# Altium PCB 600米舵机驱动接口板V1.0.PcbDoc
Units mm, origin at the board's own origin, x right, y up, seen from the top; angles counter-clockwise.
Board outline 40 x 40 mm, 2 copper layers (Top Layer, Bottom Layer); 37 components, 27 nets, 182 pads, 70 vias.
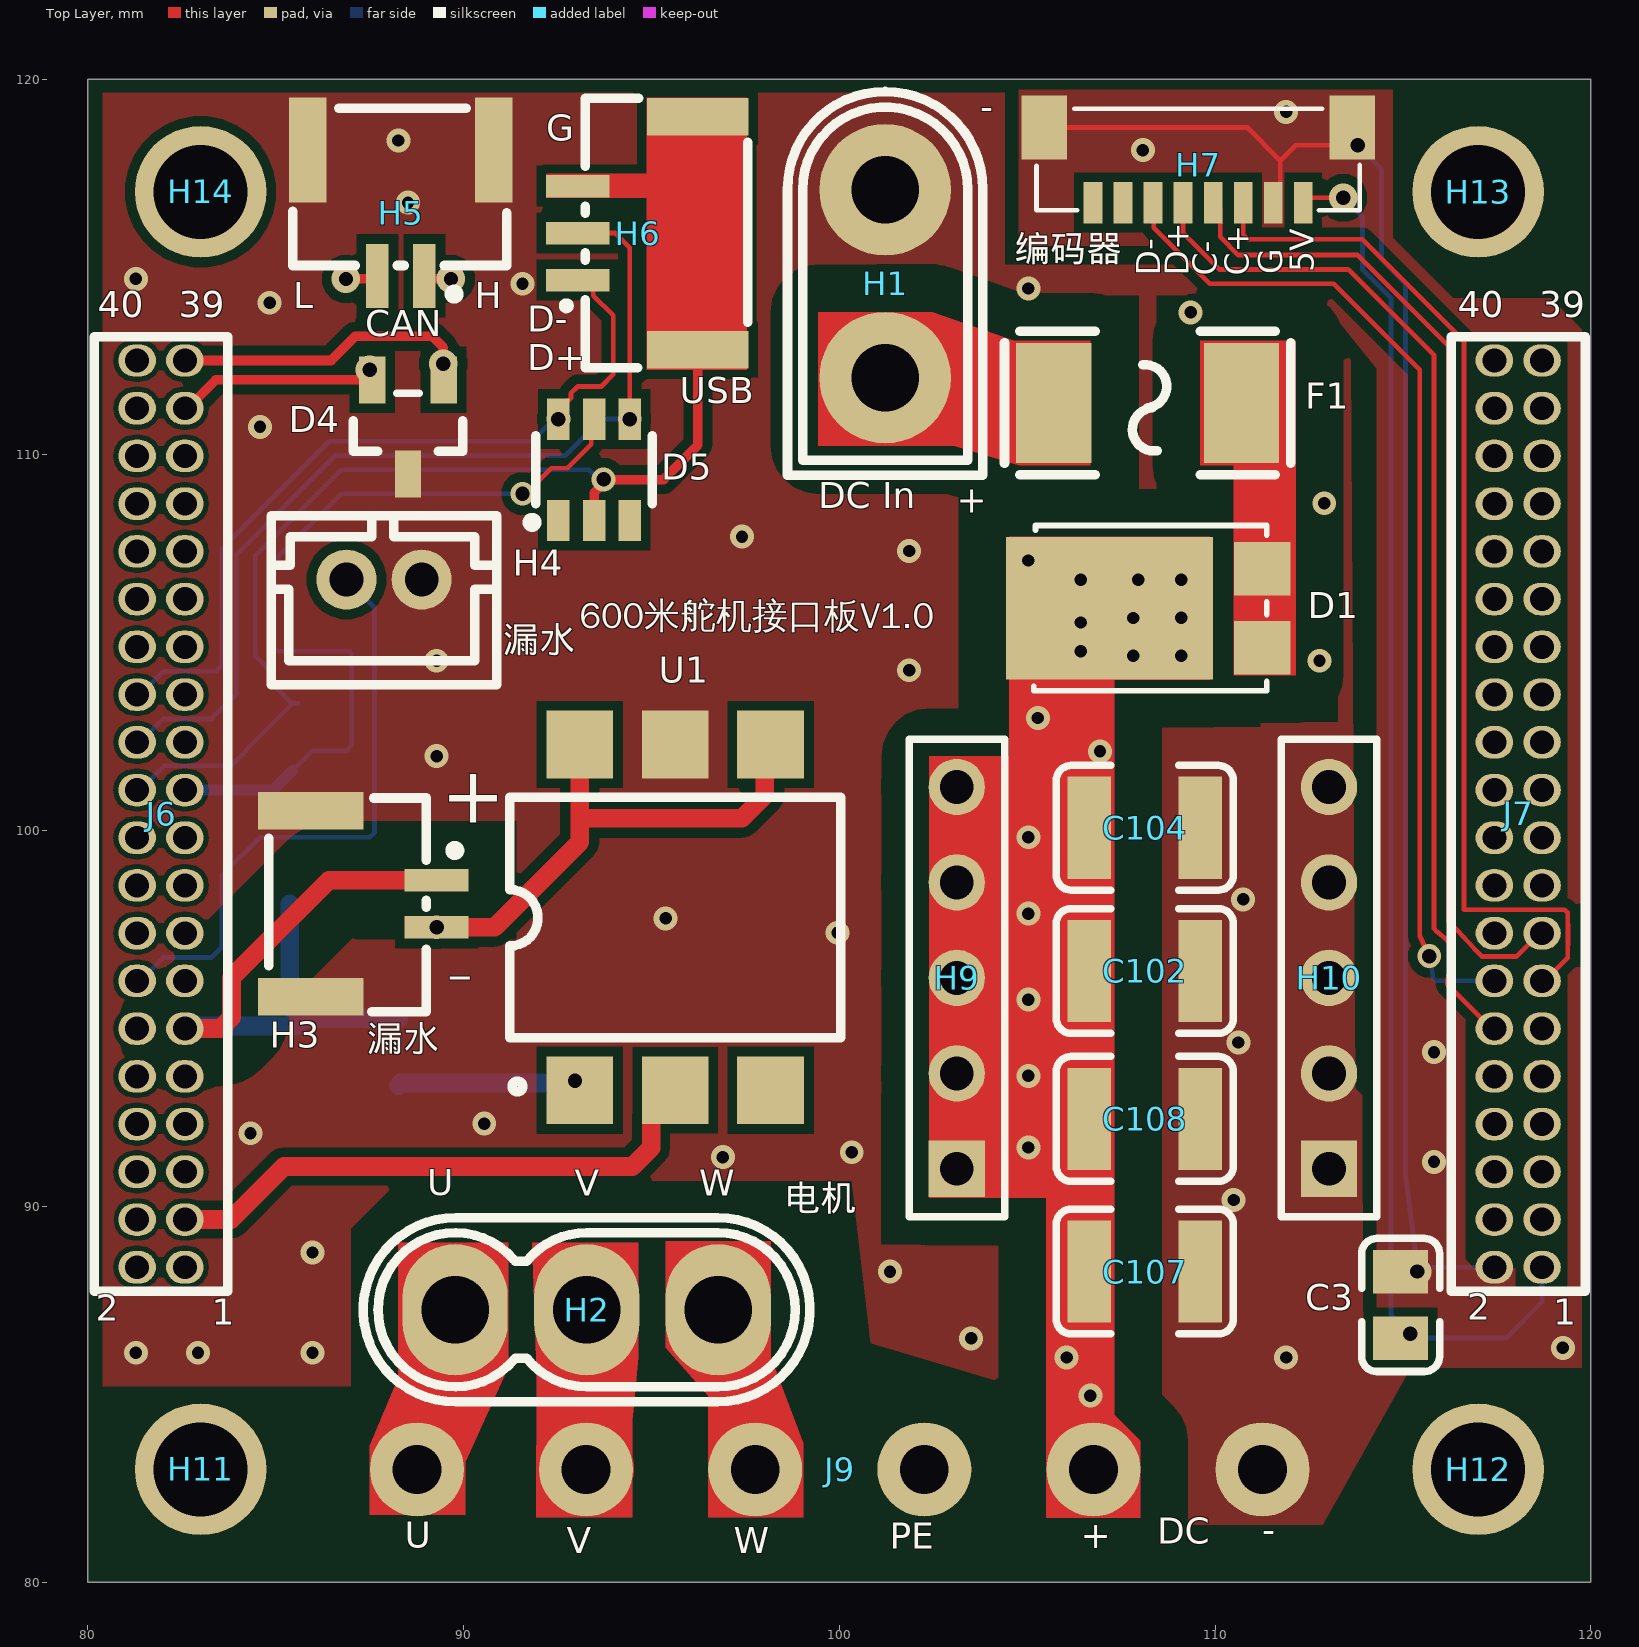
[diagram p0: Top Layer view]
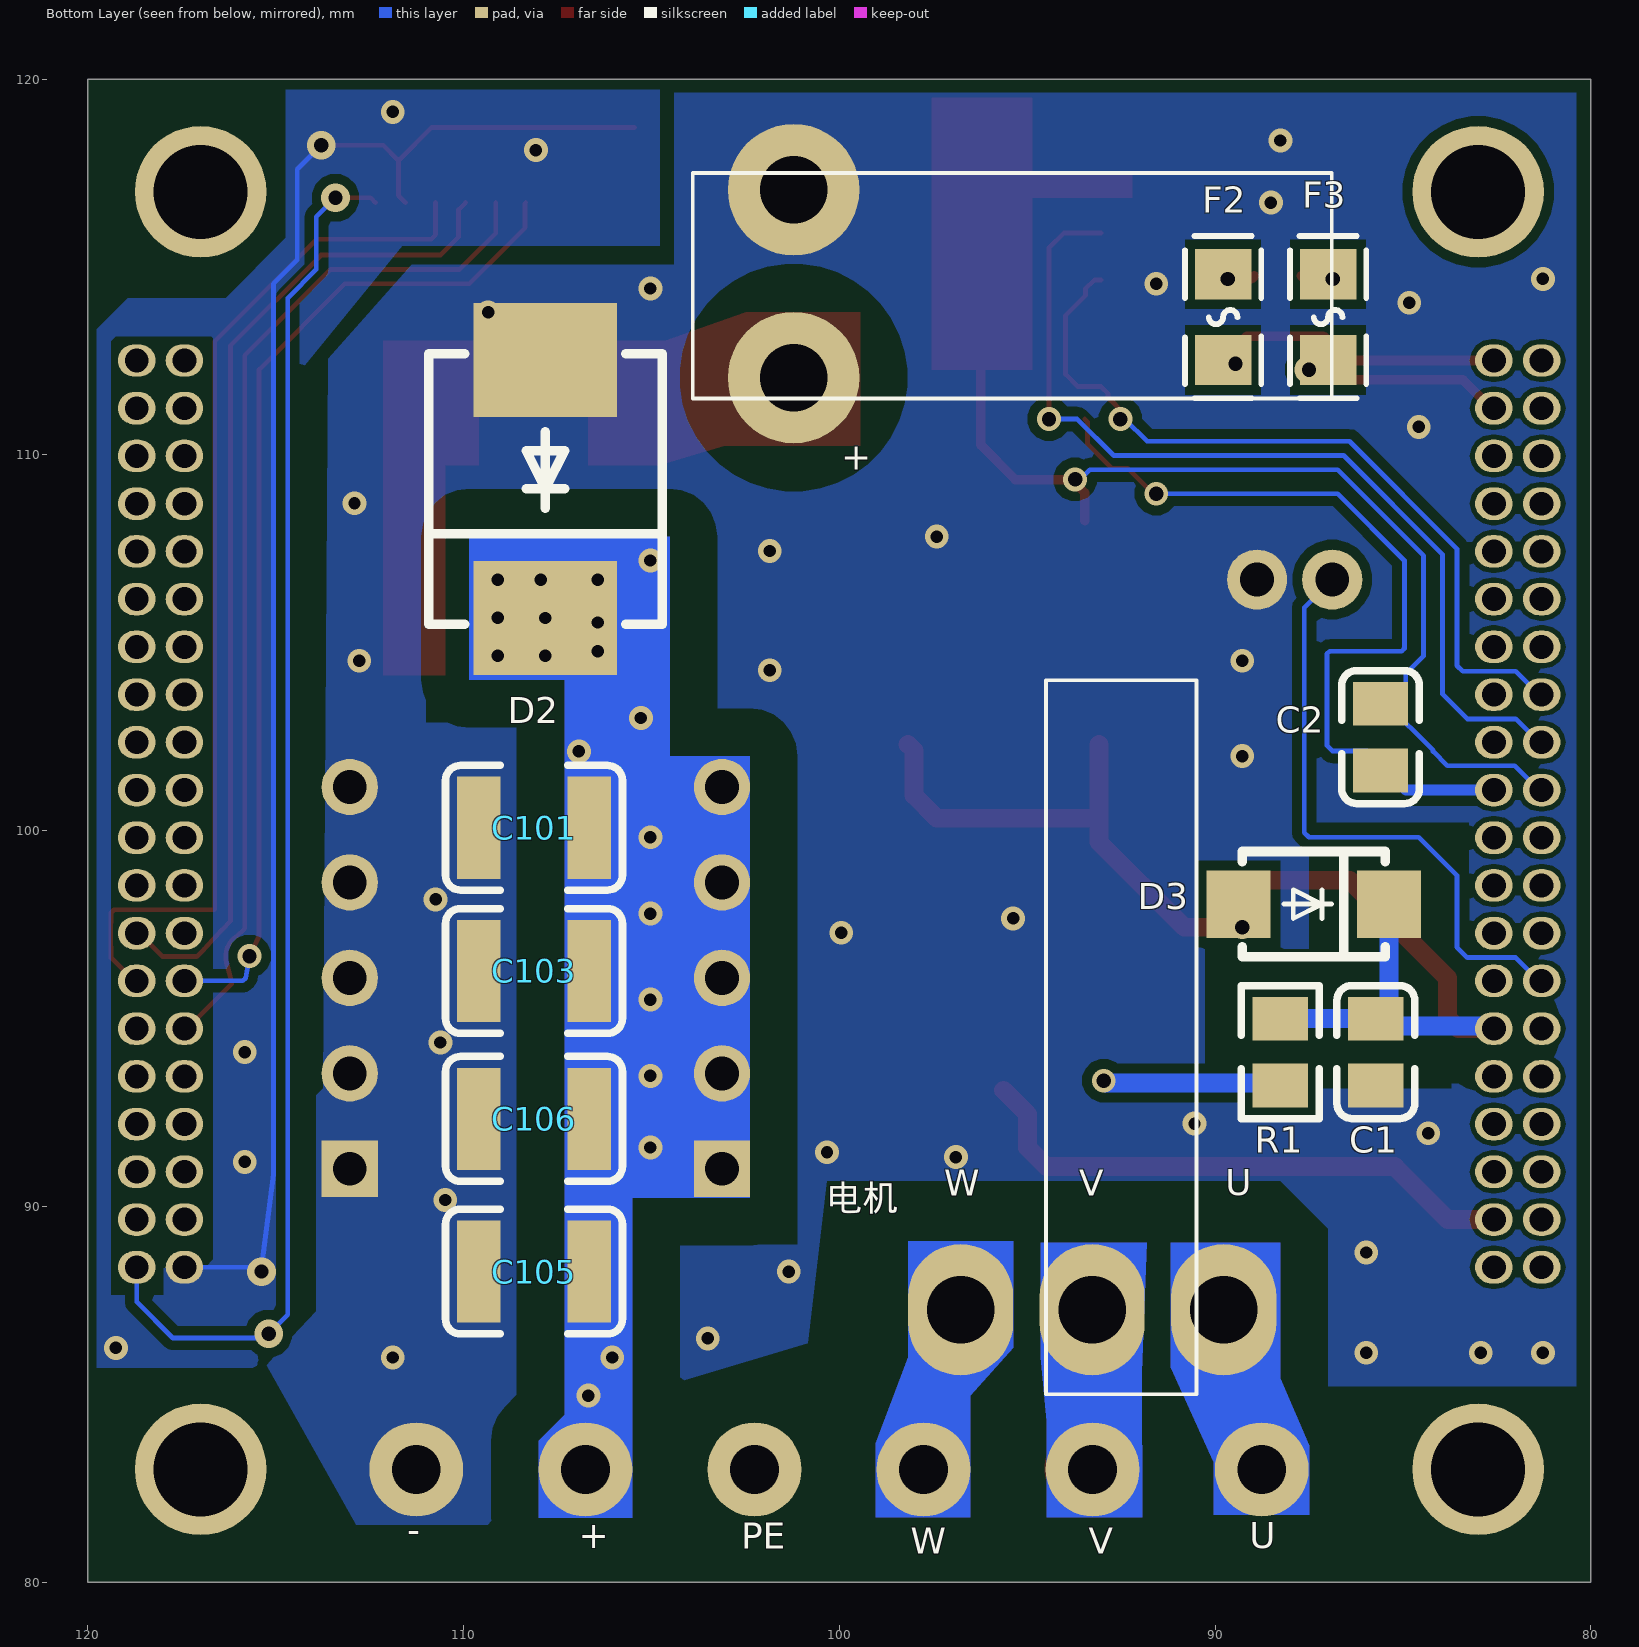
[diagram p1: Bottom Layer view, seen from below]
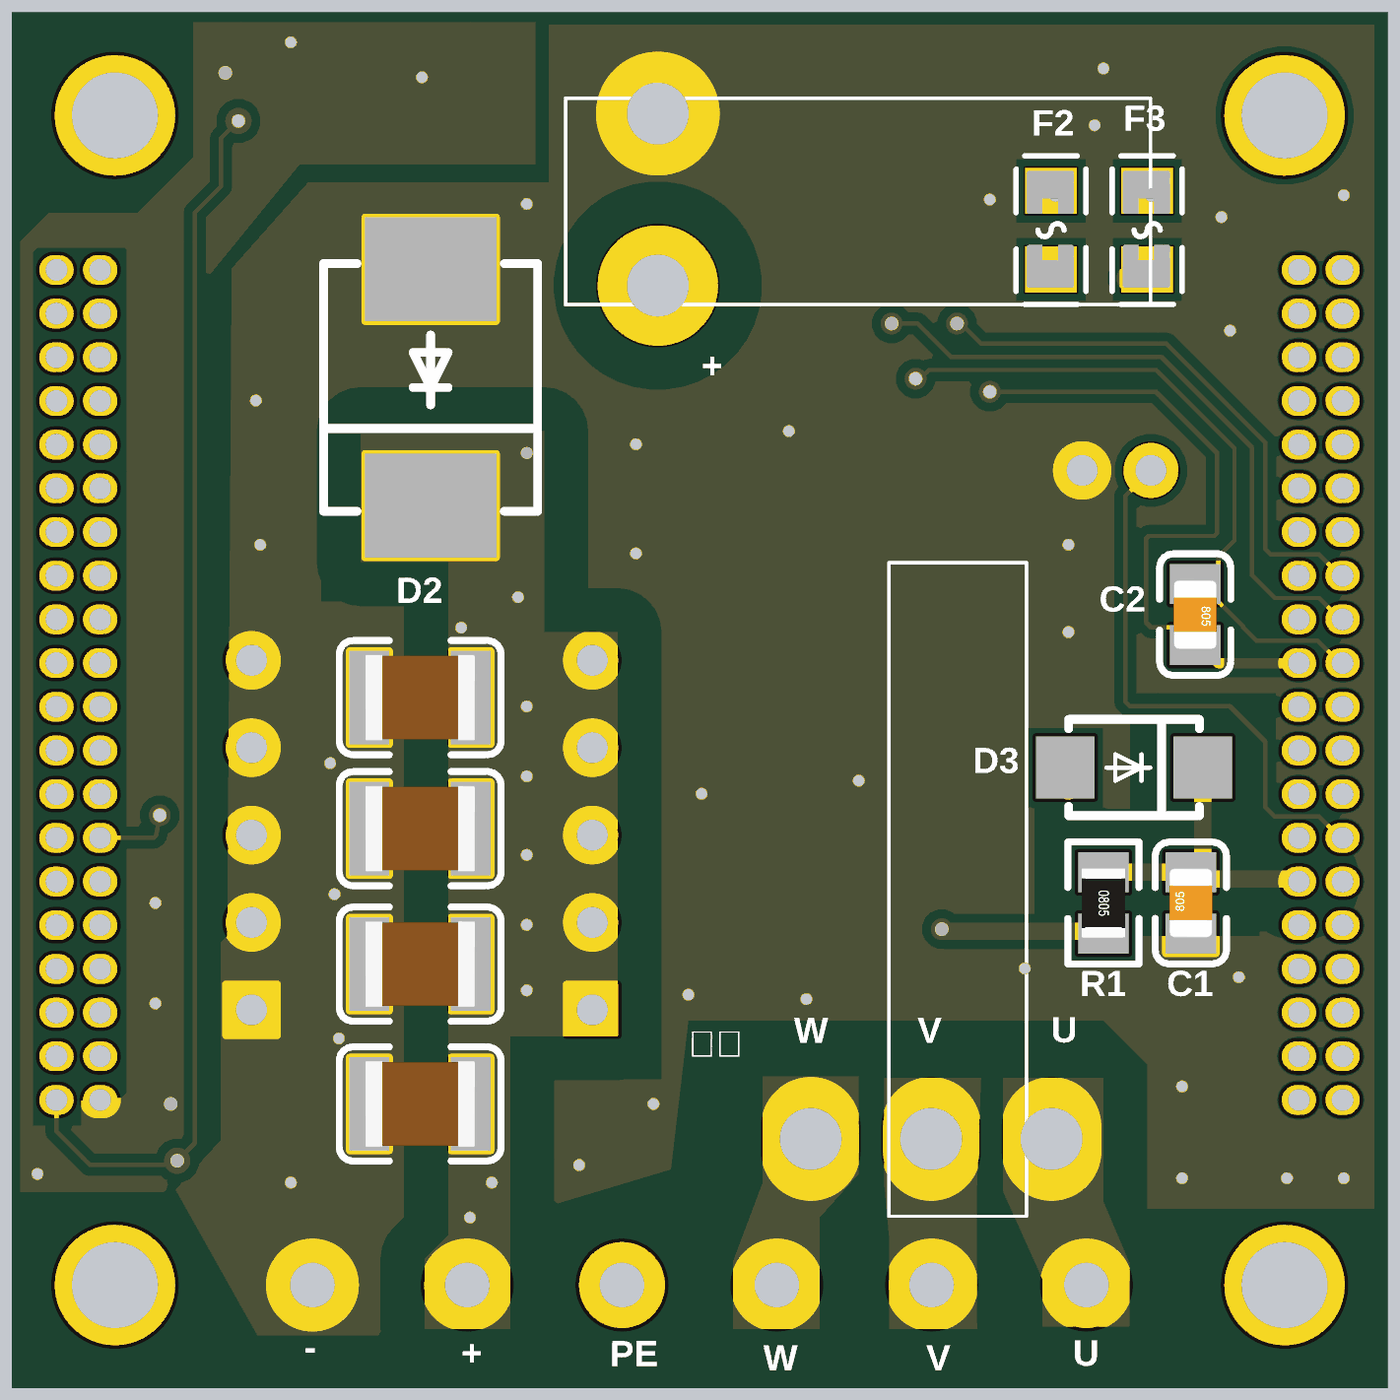
[diagram p2: 3D render of the assembled board from below, using the file's embedded part models]

## Layer stack, top to bottom
Top Solder: solder mask 0.0102, Solder Resist, Dk 3.5
Top Layer: signal copper 0.0356
Dielectric 1: dielectric 0.32, FR-4, Dk 4.8
Bottom Layer: signal copper 0.0356
Bottom Solder: solder mask 0.0102, Solder Resist, Dk 3.5

## Board outline
80,80 80,120 120,120 120,80

## Design rules (kind name [scope] priority, off if disabled: settings)
Clearance 48V [(InNamedPolygon('Bottom0V') OR InNamedPolygon('BottomEncgnd') OR InNamedPolygon('Top0V') OR InNamedPolygon('TopEncgnd')) vs (InNet('24V') OR InNet('DC+') OR InNet('NetD1_1') OR InNet('NetF1_1'))] p1: gap=1.27 ignorepadtopadclearanceinfootprint=FALSE
Clearance Clearance_1 [HasFootprint('HDR-TH_40P-P1.27-V-M-R2-C20-S1.27-ISMC')] p2: gap=0.127 ignorepadtopadclearanceinfootprint=FALSE
Clearance tssop14 [HasFootprint('TSSOP-14_L5.0-W4.5-P0.65-LS6.4-BL')] p3: gap=0.01 ignorepadtopadclearanceinfootprint=TRUE
Clearance [All] p4: gap=0.254 ignorepadtopadclearanceinfootprint=FALSE
PlaneConnect [All] p1: planeconnectstyle=Direct reliefexpansion=0.508 reliefentries=4 reliefconductorwidth=0.254 reliefairgap=0.254
PolygonConnect [All] p1: connectstyle=Direct reliefconductorwidth=0.254 reliefentries=4 polygonreliefangle="90 Angle" airgapwidth=0.254
RoutingVias [All] p1: holewidth=0.711 width=1.27 viastyle="Through Hole" minholewidth=0.711 minwidth=1.27 maxholewidth=0.711 maxwidth=1.27
SolderMaskExpansion [All] p1: expansion=0.102 istentingtop=FALSE
SupplyNets "Schematic Supply Nets_9" [InNet('DC+')] p1: voltage=0.000
SupplyNets "Schematic Supply Nets_8" [InNet('PE')] p2: voltage=0.000
SupplyNets "Schematic Supply Nets_2" [InNet('USB_GND')] p3: voltage=0.000
SupplyNets "Schematic Supply Nets" [InNet('Encoder_GND')] p4: voltage=0.000
SupplyNets "Schematic Supply Nets_1" [InNet('24V')] p5: voltage=0.000
SupplyNets "Schematic Supply Nets_7" [InNet('0V')] p6: voltage=0.000
SupplyNets "Schematic Supply Nets_6" [InNet('V')] p7: voltage=0.000
SupplyNets "Schematic Supply Nets_5" [InNet('U')] p8: voltage=0.000
SupplyNets "Schematic Supply Nets_4" [InNet('W')] p9: voltage=0.000
Width 5mil [(InNet('Encoder_5V') OR InNet('Encoder_GND') OR InNet('Encoder_CLK+') OR InNet('Encoder_CLK-') OR InNet('Encoder_D+') OR InNet('Encoder_D-') OR InNet('DI_RET') OR InNet('USB_D+') OR InNet('USB_D-') OR InNet('USB_VBUS') OR InNet('USB_GND'))] p1: maxlimit=0.762 minlimit=0.127 preferedwidth=0.127
Width Width_1 [All] p2: maxlimit=7.62 minlimit=0.254 preferedwidth=0.254
29 further rules are at their usual default settings.

## Components (designator, comment, footprint, x,y, rotation, side; value= is the part's Value field where it differs from the comment)
C1 "0.1uF  100V" 0805_C 85.725,94.107 r90 bottom
C2 "0.1uF 50V" 0805_C 85.598,102.489 r270 bottom
C3 "0.1uF 50V" 0805_C 114.935,87.376 r270 top
C101 "4.7uf 100V" 1210_C 108.127,100.076 r180 bottom value=4.7uF
C102 "4.7uf 100V" 1210_C 108.127,96.266 r180 top value=4.7uF
C103 "4.7uf 100V" 1210_C 108.127,96.266 r180 bottom value=4.7uF
C104 "4.7uf 100V" 1210_C 108.127,100.076 r180 top value=4.7uF
C105 "4.7uf 100V" 1210_C 108.127,88.265 r180 bottom value=4.7uF
C106 "4.7uf 100V" 1210_C 108.127,92.329 r180 bottom value=4.7uF
C107 "4.7uf 100V" 1210_C 108.127,88.265 r180 top value=4.7uF
C108 "4.7uf 100V" 1210_C 108.127,92.329 r180 top value=4.7uF
D1 "SD10U100SL" TO-227B-SMD_L6.1-W4.3-LS7.0-RD 109.221,105.918 r0 top
D2 "SMCJ48A/TR13" SMC_L7.1-W6.2-LS8.1-FD 107.823,109.093 r270 bottom
D3 "SS14" SMAF_L3.5-W2.6-LS4.7-FD 87.376,98.044 r180 bottom
D4 "PSM712-LF-T7" SOT-23(SOT-23-3) 88.519,110.744 r90 top
D5 "UBT26A05L03" SOT-23-6_L2.9-W1.6-P0.95-LS2.8-BR 93.472,109.601 r270 top
F1 "JFC2410-2100TS" F2410 108.204,111.379 r0 top
F2 "BSMD0805-001-60V" F0805 89.789,113.665 r90 bottom
F3 "BSMD0805-001-60V" F0805 86.995,113.665 r90 bottom
H1 "XT30U-M" CONN-TH_XT30U-M-PCB 101.219,114.554 r90 top
H2 "MR30-M" CONN-TH_MR30-M-PCB 93.274,87.249 r0 top
H3 "GH1.25-2P 立贴" CONN-TH_2P-P1.25_XUNPU_WAFER-GH1.25-2PLB 87.606,98.054 r270 top
H4 "PH 2P" CONN-TH_B2B-PH-K-S 87.884,106.68 r180 top
H5 "GH1.25-2P立贴" CONN-TH_2P-P1.25_XUNPU_WAFER-GH1.25-2PLB 88.33,116.435 r180 top
H6 "GH1.25-3P立贴" CONN-SMD_3P-P1.25_GH1.25-3PLTPZ 94.637,115.902 r90 top
H7 "SM08B-SURS-TF(LF)(SN)" CONN-SMD_SM08B-SURS-TF 109.546,117.712 r180 top
H9 "1×6插针 2.54" HDR1X5 103.124,91 r90 top locked
H10 "1×6插针 2.54" HDR1X5 113.03,91 r90 top locked
H11 "定位孔" Hole-2.5×3.5#1 83.058,75.946 r0 top
H12 "定位孔" Hole-2.5×3.5#2 117.348,75.692 r0 top
H13 "定位孔" Hole-2.5×3.5#3 123.825,116.967 r0 top
H14 "定位孔" Hole-2.5×3.5#4 75.311,113.919 r0 top
J6 "2*20-φ1.27" HDR-TH_40P-P1.27-V-M-R2-C20-S1.27-ISMC 81.948,100.445 r90 top locked
J7 "2*20-φ1.27" HDR-TH_40P-P1.27-V-M-R2-C20-S1.27-ISMC 118.065,100.445 r90 top locked
J9 "φ1.3" ISMC_POWER 88.76,83 r0 top locked
R1 "3.9kΩ  1%" 0805_R 88.265,94.107 r270 bottom
U1 "GAQV211G4EH" SMD-6_L8.8-W6.4-P2.54-LS9.6-BL 95.631,97.691 r0 top

## Footprints (in the part's own frame and the unit in brackets; to place one, negate y for a bottom-side part, rotate by r counter-clockwise, add the part's x,y. Pads: shape width x height; smd on the part's side, far side on the other; paste and mask are expansions set on the pad)
0805_C [mm]
  rect 1.16x1.47 smd: 1(-0.89,0) 2(0.89,0)
  silkscreen extent -1.77,-1.04 1.77,1.04, body extent -1,-0.63 1,0.63, height 0.77
0805_R [mm]
  rect 1.16x1.47 smd: 1(-0.89,0) 2(0.89,0)
  silkscreen extent -1.77,-1.04 1.77,1.03, body extent -1,-0.63 1,0.63, height 0.49
1210_C [mm]
  rect 1.16x2.72 smd: 1(-1.475,0) 2(1.475,0)
  silkscreen extent -2.36,-1.66 2.35,1.66, body extent -1.6,-1.25 1.6,1.25, height 1.3
CONN-SMD_3P-P1.25_GH1.25-3PLTPZ [mm]
  rect 0.6x1.7 smd: 1(-1.25,1.6) 2(0,1.6) 3(1.25,1.6)
  rect 1x2.7 smd: 4(-3.1,-1.6) 5(3.1,-1.6)
  silkscreen extent -3.59,-2.92 3.58,2
CONN-SMD_SM08B-SURS-TF [mm]
  rect 0.5x1.1 smd paste+0 mask+0.05: 1(-2.8,1) 2(-2,1) 3(-1.2,1) 4(-0.4,1) 5(0.4,1) 6(1.2,1) 7(2,1) 8(2.8,1)
  rect 1.21x1.7 smd paste+0 mask+0.05: 9(-4.1,-1) 10(4.1,-1)
  silkscreen extent -4.3,-1.5 4.3,1.2
CONN-TH_2P-P1.25_XUNPU_WAFER-GH1.25-2PLB [mm]
  rect 0.6x1.7 smd: 1(-0.625,1.675) 2(0.625,1.675)
  rect 1x2.8 smd: 3(2.475,-1.675) 4(-2.475,-1.675)
  silkscreen extent -2.81,-2.79 2.87,2.29
CONN-TH_B2B-PH-K-S [mm]
  round 1.6 hole 0.9 paste-2539.97 mask+0.051: 1(1,0) 2(-1,0)
  silkscreen extent -3,-1.7 3,2.8
CONN-TH_MR30-M-PCB [mm]
  oval 2.8x3.5 hole 1.8 paste-2539.97 mask+0.05: 1(-3.5,0) 2(0,0) 3(3.5,0)
  silkscreen extent -5.94,-2.45 5.94,2.45
CONN-TH_XT30U-M-PCB [mm]
  round 3.5 hole 1.8 paste-2539.97 mask+0.05: 1(-2.5,0) 2(2.5,0)
  silkscreen extent -5.1,-2.6 5.11,2.6
F0805 [mm]
  rect 1.335x1.5 smd paste-100 mask+0.051: 1(-1.142,0) 2(1.142,0)
  silkscreen extent -2.16,-1.02 2.16,1.02
F2410 [mm]
  rect 2x3.2 smd: 1(-2.5,0) 2(2.5,0)
  silkscreen extent -3.81,-1.91 3.81,1.91
HDR1X5 [mm] "Connector; Header; 5 Position"
  rect 1.5x1.5 hole 0.9: 1(0,0)
  round 1.5 hole 0.9: 2(2.54,0) 3(5.08,0) 4(7.62,0) 5(10.16,0)
  silkscreen extent -1.27,-1.27 11.43,1.27
HDR-TH_40P-P1.27-V-M-R2-C20-S1.27-ISMC [mm]
  oval 0.864x1 hole 0.635: 1(-12.065,-0.635) 2(-12.065,0.635) 3(-10.795,-0.635) 4(-10.795,0.635) 5(-9.525,-0.635) 6(-9.525,0.635) 7(-8.255,-0.635) 8(-8.255,0.635) 9(-6.985,-0.635) 10(-6.985,0.635) 11(-5.715,-0.635) 12(-5.715,0.635) 13(-4.445,-0.635) 14(-4.445,0.635) 15(-3.175,-0.635) 16(-3.175,0.635) 17(-1.905,-0.635) 18(-1.905,0.635) 19(-0.635,-0.635) 20(-0.635,0.635) 21(0.635,-0.635) 22(0.635,0.635) 23(1.905,-0.635) 24(1.905,0.635) 25(3.175,-0.635) 26(3.175,0.635) 27(4.445,-0.635) 28(4.445,0.635) 29(5.715,-0.635) 30(5.715,0.635) 31(6.985,-0.635) 32(6.985,0.635) 33(8.255,-0.635) 34(8.255,0.635) 35(9.525,-0.635) 36(9.525,0.635) 37(10.795,-0.635) 38(10.795,0.635) 39(12.065,-0.635) 40(12.065,0.635)
  silkscreen extent -12.7,-1.78 12.7,1.78
Hole-2.5×3.5#1 [mm] "3.2mm定位孔"
  round 3.5 hole 2.5: 1(-0.058,7.054)
Hole-2.5×3.5#2 [mm] "3.2mm定位孔"
  round 3.5 hole 2.5: 1(-0.348,7.308)
Hole-2.5×3.5#3 [mm] "3.2mm定位孔"
  round 3.5 hole 2.5: 1(-6.825,0.033)
Hole-2.5×3.5#4 [mm] "3.2mm定位孔"
  round 3.5 hole 2.5: 1(7.689,3.081)
ISMC_POWER [mm] "ISMC电源针"
  round 2.5 hole 1.3: 1(0,0) 2(4.5,0) 3(9,0) 4(13.5,0) 5(18,0) 6(22.5,0)
SMAF_L3.5-W2.6-LS4.7-FD [mm]
  rect 1.7x1.8 smd: 1(-2,0) 2(2,0)
  silkscreen extent -1.9,-1.4 1.9,1.4
SMC_L7.1-W6.2-LS8.1-FD [mm]
  rect 3.03x3.82 smd: 1(-3.435,0) 2(3.435,0)
  silkscreen extent -3.6,-3.11 3.6,3.11
SMD-6_L8.8-W6.4-P2.54-LS9.6-BL [mm]
  rect 1.78x1.8 smd: 1(-2.54,-4.6) 2(0,-4.6) 3(2.54,-4.6) 4(2.54,4.6) 5(0,4.6) 6(-2.54,4.6)
  silkscreen extent -4.4,-4.64 4.4,3.2
SOT-23(SOT-23-3) [mm]
  rect 1.25x0.7 smd: 1(1.25,-0.95) 2(1.25,0.95) 3(-1.25,0)
  silkscreen extent -0.65,-1.46 0.9,1.46, body extent -1.5,-1.5 1.5,1.5, height 1.3
SOT-23-6_L2.9-W1.6-P0.95-LS2.8-BR [mm]
  rect 1.1x0.6 smd paste+0 mask+0.051: 1(1.35,-0.95) 2(1.35,0) 3(1.35,0.95) 4(-1.35,0.95) 5(-1.35,0) 6(-1.35,-0.95)
  silkscreen extent -0.9,-1.78 1.52,1.55
TO-227B-SMD_L6.1-W4.3-LS7.0-RD [mm]
  rect 1.5x1.422 smd: 1(2.033,-1.05) 2(2.033,1.05)
  rect 5.5x3.8 smd: 3(-2.033,0)
  silkscreen extent -4.05,-2.2 2.15,2.2

## Part data
C1 C2 C3: library part "0805 1uF (105) 10% 50V", "贴片电容", Package=0805, SuppliersPartNumber=C28323, ComponentLink1Description=供应商链接, ComponentLink1URL=http://www.szlcsc.com/product/details_29074.html, Supplier=LC
C101 C102 C103 C104 C105 C106 C107 C108: library part "1210 4.7uf", "贴片电容", JLCPCB Part Class="Extended Part", LCSC Part Name="4.7uF ±10% 100V", Manufacturer=FH(风华), Manufacturer Part=1210B475K101NT, Temperature Coefficient=X7R, Tolerance=±10%, Voltage Rated=100V, Add into BOM=yes, Convert to PCB=yes, Datasheet=https://atta.szlcsc.com/upload/public/pdf/source/20210617/C2840282_5B7AB5BFD77495008CFAB3FC2796A0E9.pdf, Device=1210B475K101NT, Supplier=LCSC, Supplier Footprint=1210, Supplier Part=C2840282, Symbol=1210B475K101NT
D1: "肖特基二极管", Forward Voltage (Vf@If)=570mV@10A, JLCPCB Part Class="Extended Part", LCSC Part Name="电压:100V 电流:10A", Manufacturer=LGE(鲁光), Rectified Current=10A, Reverse Leakage Current (Ir)=200uA@100V, Reverse Voltage (Vr)=100V, Add into BOM=yes, Convert to PCB=yes, Datasheet=https://atta.szlcsc.com/upload/public/pdf/source/20211009/BD93C46FB22A14806A56CC8AAFB52095.pdf, Device=SD10U100SL, Diode Configuration=独立式, Manufacturer Part=SD10U100SL, Supplier=LCSC, Supplier Footprint=TO-277, Supplier Part=C2903879, Symbol=SD10U100SL
D2: "TVS", Breakdown Voltage=53.3V, JLCPCB Part Class="Extended Part", Manufacturer=Brightking(君耀电子), Maximum Clamping Voltage=77.4V, Peak Pulse Current (Ipp)=19.4A, Peak Pulse Power Dissipation (Ppp)=1.5kW, Reverse Stand-Off Voltage (Vrwm)=48V, Add into BOM=yes, Convert to PCB=yes, Datasheet=https://atta.szlcsc.com/upload/public/pdf/source/20181127/C310089_DF11A7ED4CCF9CC3586EB1D10F86E9D6.pdf, Device=SMCJ48A/TR13, LCSC Part Name=SMCJ48A/TR13, Manufacturer Part=SMCJ48A/TR13, Supplier=LCSC, Supplier Footprint=SMC(DO-214AB), Supplier Part=C310056, Symbol=SMCJ48A_C310056, Type=TVS
D3: library part SS34F_C908669, Average Rectified Current (Io)=3A, Forward Voltage (Vf@If)=550mV@3A, JLCPCB Part Class="Extended Part", LCSC Part Name="电压:40V 电流:3A", Manufacturer=GOODWORK(固得沃克), Manufacturer Part=SS34F, Reverse Leakage Current (Ir)=200uA@40V, Reverse Voltage (Vr)=40V, Add into BOM=yes, Convert to PCB=yes, Datasheet=https://atta.szlcsc.com/upload/public/pdf/source/20201231/C908669_14F884D2643FB3EE455C9EAA3A20B275.pdf, Device=SS34F_C908669, Diode Configuration=独立式, Supplier=LCSC, Supplier Footprint=SMAF, Supplier Part=C908669, Symbol=SS34F_C908669
D4: "双向TVS", Clamping Voltage=19V, JLCPCB Part Class="Basic Part", Manufacturer=PROTEK, Reverse Stand-Off Voltage (Vrwm)=12V, Voltage - Breakdown=13.3V, Add into BOM=yes, Convert to PCB=yes, Datasheet=https://atta.szlcsc.com/upload/public/pdf/source/20140717/1457707154667.pdf, Device=PSM712-LF-T7, LCSC Part Name=PSM712-LF-T7, Manufacturer Part=PSM712-LF-T7, Supplier=LCSC, Supplier Footprint=SOT-23, Supplier Part=C32677, Symbol=PSM712-LF-T7, Type=TVS
D5: "TVS", Breakdown Voltage=6V, JLCPCB Part Class="Extended Part", Manufacturer=Brightking(君耀电子), Maximum Clamping Voltage=17V, Add into BOM=yes, Convert to PCB=yes, Datasheet=https://atta.szlcsc.com/upload/public/pdf/source/20200427/C523544_824ACAC2A221CAA635828872F8565CA9.pdf, Device=UBT26A05L03, LCSC Part Name=UBT26A05L03, Manufacturer Part=UBT26A05L03, Number of Lines=双路, Supplier=LCSC, Supplier Footprint=SOT-23-6L, Supplier Part=C523544, Symbol=UBT26A05L03, Type=ESD
F1: "保险管", Breaking Capacity=50A, Current Rating=10A, JLCPCB Part Class="Extended Part", LCSC Part Name="10A 125V 贴片式保险丝 慢断", Manufacturer=JDTfuse(集电通), Operating Temperature=-55℃~+125℃, Voltage Rating  (AC)=125V, Add into BOM=yes, Convert to PCB=yes, Datasheet=https://atta.szlcsc.com/upload/public/pdf/source/20230515/1D43BDD82FA89335B41B370141760CD9.pdf, Device=JFC2410-2100TS, Manufacturer Part=JFC2410-2100TS, Supplier=LCSC, Supplier Footprint=SMD, Supplier Part=C136391, Symbol=JFC2410-2100TS, Type=贴片式保险丝, Voltage Rating (DC)=125V
F2 F3: "自恢复保险", Current Rating (Max)=30A, Hold Current=10mA, JLCPCB Part Class="Extended Part", LCSC Part Name="60V 10mA 0805自恢复", Manufacturer=BHFUSE(佰宏), Operating Voltage (Max)=60V, Power Dissipation=500mW, Resistance - Initial (Ri) (Min)=15Ω, Resistance - Post Trip (R1) (Max)=100Ω, Trip Current=50mA, Add into BOM=yes, Convert to PCB=yes, Datasheet=https://atta.szlcsc.com/upload/public/pdf/source/20230512/7A46D6CD923C15CBB98FD769C08EDD80.pdf, Device=BSMD0805-001-60V, Manufacturer Part=BSMD0805-001-60V, Maximum Time to Trip=1.5s, Supplier=LCSC, Supplier Footprint=0805, Supplier Part=C5222212, Symbol=BSMD0805-001-60V
H1: Colour=黄色, contact resistance=-, JLCPCB Part Class="Extended Part", LCSC Part Name="AMASS(艾迈斯)轻量版锂电池插头公头 XT30U-M", Manufacturer=AMASS(艾迈斯), Add into BOM=yes, Belt length=-, Brand=艾迈斯, Convert to PCB=yes, Datasheet=https://atta.szlcsc.com/upload/public/pdf/source/20170606/1496716542582.pdf, Device=XT30U-M, FlameRetardantGrade=-, Input=-, InsulationMaterial=-, Interface=-, InterfaceType=公头, Manufacturer Part=XT30U-M, MaximumCurrent=-, MetalMaterial=-, Model=XT30U-M, NumberOfUSBHoles=-, Output=-, Power=-, RatedCurrent=-, RatedVoltage=-, RecommendedWireGauge=-, Size=-, specifications=-, Supplier=LCSC, Supplier Footprint=-, Supplier Part=C99101, Symbol=XT30U-M, Type=插头, Type1=-
H2: Colour=-, JLCPCB Part Class="Extended Part", LCSC Part Name="AMASS(艾迈斯)锂电池三芯电源连接器公头MR30-M 2件套", Manufacturer=AMASS(艾迈斯), Add into BOM=yes, Belt length=-, Brand=艾迈斯, contact resistance=-, Convert to PCB=yes, Datasheet=https://atta.szlcsc.com/upload/public/pdf/source/20170412/1491969315720.pdf, Device=MR30-M, FlameRetardantGrade=-, Input=-, InsulationMaterial=-, Interface=-, InterfaceType=公头, Manufacturer Part=MR30-M, MaximumCurrent=-, MetalMaterial=-, Model=MR30-M, NumberOfUSBHoles=-, Output=-, Power=-, RatedCurrent=-, RatedVoltage=-, RecommendedWireGauge=-, Size=-, specifications=3pin, Supplier=LCSC, Supplier Footprint=-, Supplier Part=C99873, Symbol=MR30-M, Type=航空插头, Type1=-
H3: library part WAFER-GH1.25-2PLB, Current Rating (Max)=1A, JLCPCB Part Class="Extended Part", LCSC Part Name="1x2P 间距:1.25mm 立贴 系列:GH", Manufacturer=XUNPU(讯普), Operating Temperature Range=-25℃~+85℃, Add into BOM=yes, Convert to PCB=yes, Datasheet=https://atta.szlcsc.com/upload/public/pdf/source/20220527/44F824AAC8C2B617205E15955FF9C23D.pdf, Device=WAFER-GH1.25-2PLB, Manufacturer Part=WAFER-GH1.25-2PLB, Mounting Style=立贴, Number of Pins=2P, Number of PINs Per Row=2, Number of Rows=1, Pins Structure=1x2P, Pitch=1.25mm, Reference Series=GH, Supplier=LCSC, Supplier Footprint=SMD,P=1.25mm, Supplier Part=C3029368, Symbol=WAFER-GH1.25-2PLB
H4: library part PH2.0-2P, "端子", JLCPCB Part Class="Extended Part", LCSC Part Name=B2B-PH-K-S(LF)(SN), Manufacturer=JST, Add into BOM=yes, Contact Material=黄铜, Convert to PCB=yes, Datasheet=https://atta.szlcsc.com/upload/public/pdf/source/20171026/C131337_15089839672461058811.pdf, Device=B2B-PH-K-S(LF)(SN), Manufacturer Part=B2B-PH-K-S(LF)(SN), Mounting Style=-, Name=B2B-PH-K-S(LF)(SN), Number of PINs Per Row=2, Number of Rows=1, Pins Structure=1x2P, Pitch=2mm, Reference Series=PH, Row Spacing=-, Supplier=LCSC, Supplier Footprint=插件, Supplier Part=C131337, Symbol=B2B-PH-K-S(LF)(SN)
H5: library part WAFER-GH1.25-2PLB, "连接器", Current Rating (Max)=1A, JLCPCB Part Class="Extended Part", LCSC Part Name="1x2P 间距:1.25mm 立贴 系列:GH", Manufacturer=XUNPU(讯普), Operating Temperature Range=-25℃~+85℃, Add into BOM=yes, Convert to PCB=yes, Datasheet=https://atta.szlcsc.com/upload/public/pdf/source/20220527/44F824AAC8C2B617205E15955FF9C23D.pdf, Device=WAFER-GH1.25-2PLB, Manufacturer Part=WAFER-GH1.25-2PLB, Mounting Style=立贴, Number of Pins=2P, Number of PINs Per Row=2, Number of Rows=1, Pins Structure=1x2P, Pitch=1.25mm, Reference Series=GH, Supplier=LCSC, Supplier Footprint=SMD,P=1.25mm, Supplier Part=C3029368, Symbol=WAFER-GH1.25-2PLB
H6: library part GH1.25-3PLTPZ, "连接器", JLCPCB Part Class="Extended Part", LCSC Part Name=GH1.25-3P立贴编带加盖, Manufacturer=BOOMELE(博穆精密), Add into BOM=yes, Convert to PCB=yes, Datasheet=https://atta.szlcsc.com/upload/public/pdf/source/20211125/08A09A4909F58AF780B71FE423A00F7E.pdf, Device=GH1.25-3PLTPZ, Manufacturer Part=GH1.25-3PLTPZ, Supplier=LCSC, Supplier Footprint=-, Supplier Part=C2829261, Symbol=GH1.25-3PLTPZ
H7: "连接器", Colour=白色, Current Rating (Max)=500mA, Flame Retardant Rating=UL94V-0, JLCPCB Part Class="Extended Part", LCSC Part Name="1x8P 间距:0.8mm 卧贴 系列:SUR", Manufacturer=JST, Operating Temperature Range=-25℃~+85℃, Rated Voltage (Max)=30V, Add into BOM=yes, Contact Material=铜合金, Contact Plating=锡, Convert to PCB=yes, Datasheet=https://atta.szlcsc.com/upload/public/pdf/source/20211104/F9E1F8CA9D999D7845259FE213F9F750.pdf, Device=SM08B-SURS-TF(LF)(SN), Manufacturer Part=SM08B-SURS-TF(LF)(SN), Mounting Style=卧贴, Number of Pins=8P, Number of PINs Per Row=8, Number of Rows=1, Pins Structure=1x8P, Pitch=0.8mm, Plastic Material=PA, Reference Series=SUR, Row Spacing=-, Supplementary Features=辅助焊脚, Supplier=LCSC, Supplier Footprint=SMD,P=0.8mm,卧贴, Supplier Part=C595161, Symbol=SM08B-SURS-TF(LF)(SN), X-Length of Bottom Edge on Board (Spacing Line)=8.6mm, Y-Width of Bottom Edge on Board=2.7mm, Z-Height of the Board=1.75mm
H9 H10: library part "Header 5", "Header, 5-Pin", LatestRevisionDate=17-Jul-2002, LatestRevisionNote="Re-released for DXP Platform.", Publisher="Altium Limited"
H11 H12 H13 H14: library part Hole
J6 J7: library part 2.0-2*20PM, "插针孔", Current Rating (Max)=-, JLCPCB Part Class="Extended Part", LCSC Part Name="间距:2mm 直插", Manufacturer=BOOMELE(博穆精密), Add into BOM=yes, Circular Hole / Square Hole=-, Contact Material=-, Contact Plating=-, Convert to PCB=yes, Datasheet=https://atta.szlcsc.com/upload/public/pdf/source/20230330/72429EBD17B7DF6EF48873C4D9CA2FEF.pdf, Device=2.0-2*20PM, Holes Direction=-, Holes Structure=-, Insulation Height=-, Manufacturer Part=2.0-2*20PM, Mounting Type=直插, Number of Holes=40P, Number of Rows=双排, Operating Temperature Range=-, Pitch=2mm, Row Spacing=2mm, Soldering Temperature(Max)=-, Supplier=LCSC, Supplier Footprint=插件,P=2mm, Supplier Part=C110426, Symbol=直排母2*20p, Voltage Rating (Max)=-
J9: library part "Pin HDR1X6", "插针孔"
R1: library part "0805 82Ω (82R0) 1%", "贴片电阻", ComponentLink1Description=供应商链接, ComponentLink1URL=http://www.szlcsc.com/product/details_18529.html
U1: Isolation Voltage(Vrms)=-, JLCPCB Part Class="Extended Part", LCSC Part Name="GAQV211G4EH 1 Form A(SPST-NO) 负载电压:40V 连续负载电流:4.5A", Load Current=4.5A, Load Voltage=40V, Manufacturer=SUPSiC(国晶微半导体), Voltage - Forward(Vf)=1.2V, Add into BOM=yes, Contact Form=-, Convert to PCB=yes, Datasheet=https://atta.szlcsc.com/upload/public/pdf/source/20241011/CA0590B664AED94D4C3AAC21686DAD45.pdf, Device=GAQV211G4EH, Load Type=-, Manufacturer Part=GAQV211G4EH, RDS(on)=33mΩ, Supplier=LCSC, Supplier Footprint=SMD-6, Supplier Part=C7435166, Symbol=GAQV211G4EH, Turn-off time=50us, Turn-on time=1.5ms

## Via types
v1: diameter 0.635, hole 0.33, Top Layer to Bottom Layer, tented both sides, 55 vias
v2: diameter 0.762, hole 0.381, Top Layer to Bottom Layer, tented both sides, 8 vias
v3: diameter 0.635, hole 0.381, Top Layer to Bottom Layer, tented both sides, 7 vias

## Nets (pads, with @x,y where several pads share a name; then routed paths per layer and width w, separated by ;. In a path a pad name is that pad's centre, name@x,y a point inside that pad or via, vN(x,y) a via of type N, cw(c..) or ccw(c..) an arc to the next point about the centre after c; other vN are vias at no path point)
0V: C1.1 C101.1 C102.1 C103.1 C104.1 C105.1 C106.1 C107.1 C108.1 D2.1 D4.3 H1.2 H3.3 H3.4 H4.2 H5.3 H5.4 H10.1 H10.2 H10.3 H10.4 H10.5 J9.6 U1.5
  other v1: 111.887,85.979 81.28,86.106 82.931,86.106 85.979,86.106 103.505,86.487 101.346,88.265 85.979,88.773 110.49,90.17 96.901,91.313 100.33,91.44 84.328,91.948 90.551,92.202 110.617,94.361 99.949,97.282 95.377,97.663 110.744,98.171 89.281,101.981 101.854,104.267 89.281,104.521 112.776,104.521 101.854,107.442 97.409,107.823 112.903,108.712 84.582,110.744 109.347,113.792 84.836,114.046 105.029,114.427 91.567,114.554 81.28,114.681 88.519,116.713 88.265,118.364
24V: C1.2 D3.2 H3.1 J6.11 R1.1 | length 17.9
  Top Layer w0.5: J6.11 83.527,94.73 83.82,95.023 83.82,96.081 86.418,98.679 H3.1
  Bottom Layer w0.5: J6.11 82.653,94.8 85.528,94.8 C1.2 ; D3.2 85.376,95.327 85.706,94.997 C1.2 ; R1.1 C1.2
CAN_H: F3.2 H5.2 | length 0.9
  Top Layer w0.254: v2(86.868,114.681) 87.626,114.681 H5.2
CAN_L: F2.2 H5.1 | length 0.7
  Top Layer w0.254: H5.1 89.034,114.681 v2(89.662,114.681)
CANH: D4.2 F3.1 J6.37 | length 5.3
  Top Layer w0.254: J6.37 82.651,111.24 83.405,111.994 D4.2
  other v2: 87.503,112.268
CANL: D4.1 F2.1 J6.39 | length 8.1
  Top Layer w0.254: J6.39 86.475,112.51 87.122,113.157 89.154,113.157 89.46,112.851 89.46,112.003 D4.1
  other v2: 89.46,112.427
DC+: C101.2 C102.2 C103.2 C104.2 C105.2 C106.2 C107.2 C108.2 D1.3 D2.2 H9.1 H9.2 H9.3 H9.4 H9.5 J9.5
  other v1: 106.68,84.963 106.045,85.979 105.029,91.567 105.029,93.472 105.029,95.504 105.029,97.79 105.029,99.822 106.934,102.108 105.283,102.997 107.823,104.648 109.093,104.648 106.426,104.775 106.426,105.537 107.823,105.658 109.093,105.664 106.426,106.68 107.95,106.68 109.093,106.68 105.029,107.188
DI_RET: H4.1 J6.14 | length 16.1
  Bottom Layer w0.127: J6.14 81.381,96 82.003,96.622 83.287,96.622 83.566,96.901 83.566,98.806 84.582,99.822 87.503,99.822 87.63,99.949 87.63,105.934 H4.1
DO2: J6.3 U1.2 | length 15
  Top Layer w0.5: J6.3 83.808,89.65 85.217,91.059 94.488,91.059 94.991,91.562 94.991,92.451 U1.2
Encoder_5V: C3.2 H7.1 J7.1 | length 37
  Top Layer w0.127: H7.1 112.475,116.84 v2(113.411,116.84)
  Bottom Layer w0.127: v2(113.411,116.84) 113.919,116.332 113.919,114.935 114.681,114.173 114.681,87.122 115.305,86.498 117.74,86.498 118.7,87.458 J7.1
  other v2: 115.189,86.614
Encoder_CLK+: H7.3 J7.13 | length 28
  Top Layer w0.127: H7.3 110.746,115.854 110.865,115.735 113.912,115.735 116.624,113.023 116.624,97.892 119.306,97.892 119.344,97.854 119.38,97.818 119.381,97.767 119.39,97.282 cw(c118.768,97.27) 119.39,97.258 119.38,96.612 ; J7.13 118.768,96 119.343,96.575 119.38,96.612
Encoder_CLK-: H7.4 J7.15 | length 26.7
  Top Layer w0.127: H7.4 110.133,116.525 110.133,115.8 110.617,115.316 113.792,115.316 116.205,112.903 116.205,97.609 116.205,97.588 116.415,97.377 cw(c115.697,96.659) 116.444,97.347 116.904,96.848 ccw(c117.362,97.27) 116.921,96.831 117.104,96.648 117.157,96.648 118.009,96.648 118.632,97.27 J7.15
Encoder_D+: H7.5 J7.12 | length 27.5
  Top Layer w0.127: H7.5 109.146,115.898 110.109,114.935 113.538,114.935 115.824,112.649 115.824,97.442 115.824,97.389 115.898,97.315 116.099,97.15 cw(c115.697,96.659) 116.309,96.49 116.179,96.018 116.179,95.913 117.362,94.73 J7.12
Encoder_D-: H7.6 J7.14 | length 27.2
  Top Layer w0.127: H7.6 108.364,116.694 108.364,116.045 109.855,114.554 113.157,114.554 115.443,112.268 115.443,97.199 v3(115.697,96.659)
  Bottom Layer w0.127: v3(115.697,96.659) 115.8,96.08 115.804,96.077 115.875,96.006 117.424,96.006 J7.14
Encoder_GND: C3.1 H7.2 H7.9 H7.10 J7.2 | length 42.6
  Top Layer w0.127: H7.10 110.85,118.712 111.733,117.829 ; H7.2 111.733,116.898 111.733,117.829 ; v2(113.792,118.237) 112.141,118.237 111.733,117.829
  Bottom Layer w0.127: v2(113.792,118.237) 114.427,117.602 114.427,115.189 115.062,114.554 115.062,90.848 v2@115.379,88.38 ; v2(115.379,88.265) v2@115.379,88.38 ; J7.2 v2@115.379,88.38
  other v1: 119.253,86.233 115.824,91.186 115.824,94.107 108.077,118.11 111.887,119.126
NetD1_1: D1.1 D1.2 F1.2
NetD3_1: D3.1 H3.2 U1.4 U1.6 | length 13.9
  Top Layer w0.5: v3(89.281,97.429) 90.825,97.429 93.091,99.695 93.091,100.33 ; U1.6 93.091,100.33 ; U1.4 98.013,102.133 98.013,100.934 97.409,100.33 93.091,100.33
NetF1_1: F1.1 H1.1
NetR1_2: R1.2 U1.1 | length 4.8
  Bottom Layer w0.5: R1.2 88.329,93.281 92.9,93.281 v3(92.964,93.345)
PE: J9.4
U: H2.1 J9.1
USB_D+: D5.6 H6.1 J6.26 | length 21
  Top Layer w0.127: D5.6@92.522,111.201 92.759,111.438 92.78,111.438 92.855,111.512 92.855,111.633 93.04,111.819 93.658,111.819 93.98,112.141 93.98,113.708 93.453,114.236 93.453,114.415 93.216,114.652 H6.1
  Bottom Layer w0.127: J6.26 81.381,103.62 82.003,104.242 83.414,104.242 83.566,104.394 83.566,107.504 86.425,110.363 91.813,110.363 92.401,110.951 v3(92.522,110.951)
USB_D-: D5.4 H6.2 J6.24 | length 25
  Top Layer w0.127: H6.2 94.029,115.902 94.422,115.509 v3(94.422,110.951)
  Bottom Layer w0.127: J6.24 81.381,102.35 82.003,102.972 83.287,102.972 83.947,103.632 83.947,107.346 86.583,109.982 92.699,109.982 93.668,110.951 v3(94.422,110.951)
USB_GND: C2.1 D5.2 H6.3 H6.4 H6.5 J6.22 | length 26.6
  Top Layer w0.254: D5.2 93.472,108.99 93.726,109.244 v3(93.726,109.347) 93.731,109.342 95.321,109.342 96.236,110.257 H6.4
  Bottom Layer w0.127: J6.22 81.381,101.08 82.028,101.727 83.82,101.727 84.201,102.108 84.201,102.137 C2.1@85.443,103.379 ; C2.1 C2.1@85.443,103.379 ; v3(93.726,109.347) 93.589,109.347 93.335,109.601 86.741,109.601 84.455,107.315 84.455,104.648 84.927,104.176 84.927,103.896 C2.1@85.443,103.379
USB_VBUS: C2.2 D5.5 J6.21 | length 22.2
  Top Layer w0.127: v3(91.567,108.966) 91.651,108.966 92.33,109.646 92.755,109.646 93.394,110.285 93.394,110.873 D5.5
  Bottom Layer w0.127: C2.2@85.443,101.599 85.96,102.116 86.876,102.116 87.026,102.266 87.026,104.701 86.951,104.775 85.037,104.775 84.963,104.849 84.963,107.188 86.741,108.966 v3(91.567,108.966)
  Bottom Layer w0.3: J6.21 84.924,101.08 C2.2@85.443,101.599
V: H2.2 J9.2 | length 0
  Top Layer w2.5: J9.2 J9.2@93.289,83.029
W: H2.3 J9.3
pads on no net: D5.1 D5.3 H7.7 H7.8 H11.1 H12.1 H13.1 H14.1 J6.1 J6.2 J6.4 J6.5 J6.6 J6.7 J6.8 J6.9 J6.10 J6.12 J6.13 J6.15 J6.16 J6.17 J6.18 J6.19 J6.20 J6.23 J6.25 J6.27 J6.28 J6.29 J6.30 J6.31 J6.32 J6.33 J6.34 J6.35 J6.36 J6.38 J6.40 J7.3 J7.4 J7.5 J7.6 J7.7 J7.8 J7.9 J7.10 J7.11 J7.16 J7.17 J7.18 J7.19 J7.20 J7.21 J7.22 J7.23 J7.24 J7.25 J7.26 J7.27 J7.28 J7.29 J7.30 J7.31 J7.32 J7.33 J7.34 J7.35 J7.36 J7.37 J7.38 J7.39 J7.40 U1.3

## Polygon pours and split planes (outlines as drawn)
0V on Top Layer "Top0V" (solid, pour order 13): 98.298,119.634 80.391,119.634 80.391,87.63 80.391,85.217 86.995,85.217 86.995,89.408 88.265,90.678 100.33,90.678 100.838,86.36 104.648,85.217 104.648,81.534 112.857,81.534 115.24,85.776 113.924,87.214 113.919,92.964 113.734,93.149 113.608,112.555 111.379,115.062 104.394,115.062 104.394,119.634
Encoder_GND on Top Layer "TopEncgnd" (solid, pour order 0): 104.775,119.712 104.775,115.57 111.633,115.57 114.3,112.297 114.3,85.7 119.761,85.7 119.761,113.344 118.932,114.173 116.332,114.173 114.729,115.776 114.729,119.712
0V on Bottom Layer "Bottom0V" (solid, pour order 6): 98.298,119.634 80.391,119.634 80.391,87.63 80.391,85.217 86.995,85.217 86.995,89.408 88.265,90.678 100.33,90.678 100.838,86.36 104.648,85.217 104.648,81.534 112.857,81.534 115.24,85.776 113.924,87.214 113.919,92.964 113.734,93.149 113.608,112.555 111.379,115.062 104.394,115.062 104.394,119.634
Encoder_GND on Bottom Layer "BottomEncgnd" (solid, pour order 12): 104.775,119.712 104.775,115.57 111.633,115.57 114.3,112.297 114.3,85.7 119.761,85.7 119.761,113.344 118.932,114.173 116.332,114.173 114.729,115.776 114.729,119.712

## Other copper
Top Layer:
  region net DC+: 104.521,107.823 104.521,101.981 102.391,101.981 102.391,90.232 105.511,90.232 105.511,81.721 108.001,81.721 108.001,83.769 107.315,84.455 107.315,104.013 109.855,104.013 109.855,107.823
  region net USB_GND: 92.202,116.84 94.869,116.84 94.869,112.268 97.536,112.268 97.536,119.507 94.869,119.507 94.869,117.475 92.202,117.475
  region net NetF1_1: 99.441,113.792 99.441,110.236 103.048,110.236 104.775,109.728 106.68,109.728 106.68,113.03 104.648,113.03 102.489,113.792
  region net NetD1_1: 109.601,113.03 109.601,109.728 110.49,109.728 110.49,104.14 112.141,104.14 112.141,113.03
  region net W: 95.377,89.07 95.377,86.233 96.514,84.963 96.514,81.725 99.032,81.725 99.032,83.693 98.171,85.979 98.171,89.07
  region net V: 91.821,89.027 91.951,85.577 91.937,81.725 94.488,81.725 94.488,81.915 94.488,84.276 94.641,85.979 94.641,89.027
  region net U: 91.186,89.027 91.186,85.725 90.043,83.185 90.043,81.788 87.503,81.788 87.503,83.629 88.265,85.426 88.265,89.027
  pour cut-out: 116.713,113.157 116.658,113.102 116.658,88.588 116.867,88.38 117.983,88.36 117.983,87.63 119.387,87.63 119.387,113.023 119.253,113.157
Bottom Layer:
  region net DC+: 104.521,107.823 104.521,101.981 102.391,101.981 102.391,90.232 105.511,90.232 105.511,81.721 108.001,81.721 108.001,83.769 107.315,84.455 107.315,104.013 109.855,104.013 109.855,107.823
  region net U: 91.186,89.027 91.186,85.725 90.043,83.185 90.043,81.788 87.503,81.788 87.503,83.629 88.265,85.426 88.265,89.027
  region net V: 91.821,89.027 91.951,85.577 91.937,81.725 94.488,81.725 94.488,81.915 94.488,84.276 94.641,85.979 94.641,89.027
  region net W: 95.377,89.07 95.377,86.233 96.514,84.963 96.514,81.725 99.032,81.725 99.032,83.693 98.171,85.979 98.171,89.07
  pour cut-out: 116.713,113.157 116.658,113.102 116.658,88.588 116.867,88.38 117.983,88.36 117.983,87.63 119.387,87.63 119.387,113.023 119.253,113.157

## Silkscreen, mask and mechanical layers (free items; w line width, h text height)
Top Overlay:
  text "-" at 103.742,118.694 h1.2
  text "G" at 92.202,118.124 h1.2
  text "编码器" at 104.648,114.915 h1.2
  text "5V" at 112.841,114.858 h1.1 r90
  text "G" at 112.001,114.808 h1.1 r90
  text "D-" at 108.747,114.767 h1.1 r90
  text "D+" at 109.509,114.767 h1.1 r90
  text "C-" at 110.259,114.767 h1.1 r90
  text "C+" at 111.113,114.767 h1.1 r90
  text "L" at 85.471,113.665 h1.2
  text "H" at 90.297,113.665 h1.2
  text "40" at 80.264,113.425 h1.2
  text "39" at 82.423,113.425 h1.2
  text "40" at 116.459,113.425 h1.2
  text "39" at 118.618,113.425 h1.2
  text "D-" at 91.694,113.03 h1.2
  text "CAN" at 87.376,112.916 h1.2
  text "D+" at 91.694,112.014 h1.2
  text "USB" at 95.758,111.139 h1.2
  text "DC In" at 99.441,108.344 h1.2
  text "+" at 103.124,108.22 h1.2
  text "600米舵机接口板V1.0" at 93.091,105.14 h1.2
  text "漏水" at 91.059,104.501 h1.2
  text "+" at 89.408,99.715 h2.54
  text "-" at 89.535,95.07 h2.54
  text "漏水" at 87.438,93.892 h1.2
  text "U" at 89.027,90.057 h1.2
  text "V" at 92.964,90.043 h1.2
  text "W" at 96.266,90.043 h1.2
  text "电机" at 98.552,89.646 h1.2
  text "2" at 116.713,86.741 h1.2
  text "2" at 80.213,86.715 h1.2
  text "1" at 83.303,86.616 h1.2
  text "1" at 118.999,86.614 h1.2
  text "-" at 111.252,80.821 h1.2
  text "DC" at 108.458,80.785 h1.2
  text "U" at 88.428,80.674 h1.2
  text "+" at 106.426,80.661 h1.2
  text "PE" at 101.346,80.645 h1.2
  text "V" at 92.746,80.533 h1.2
  text "W" at 97.191,80.533 h1.2
Bottom Overlay:
  lines w0.1: 86.9,111.5 103.9,111.5 103.9,117.5 86.9,117.5 86.9,111.5 ; 90.5,85 94.5,85 94.5,104 90.5,104 90.5,85
  text "+" at 99.949,109.363 h1.2
  text "U" at 89.027,90.057 h1.2
  text "V" at 92.964,90.043 h1.2
  text "W" at 96.266,90.043 h1.2
  text "电机" at 100.33,89.646 h1.2
  text "-" at 111.506,80.821 h1.2
  text "U" at 88.392,80.659 h1.2
  text "+" at 106.934,80.661 h1.2
  text "PE" at 102.616,80.645 h1.2
  text "V" at 92.71,80.518 h1.2
  text "W" at 97.155,80.518 h1.2
Mechanical 1:
  the board outline again, w0.01